# Altium PCB ICAN-7006-IO.PcbDoc
Units mm, origin at the board's own origin, x right, y up, seen from the top; angles counter-clockwise.
Board outline 150 x 80 mm, 2 copper layers (Top Layer, Bottom Layer); 66 components, 116 nets, 497 pads, 0 vias.
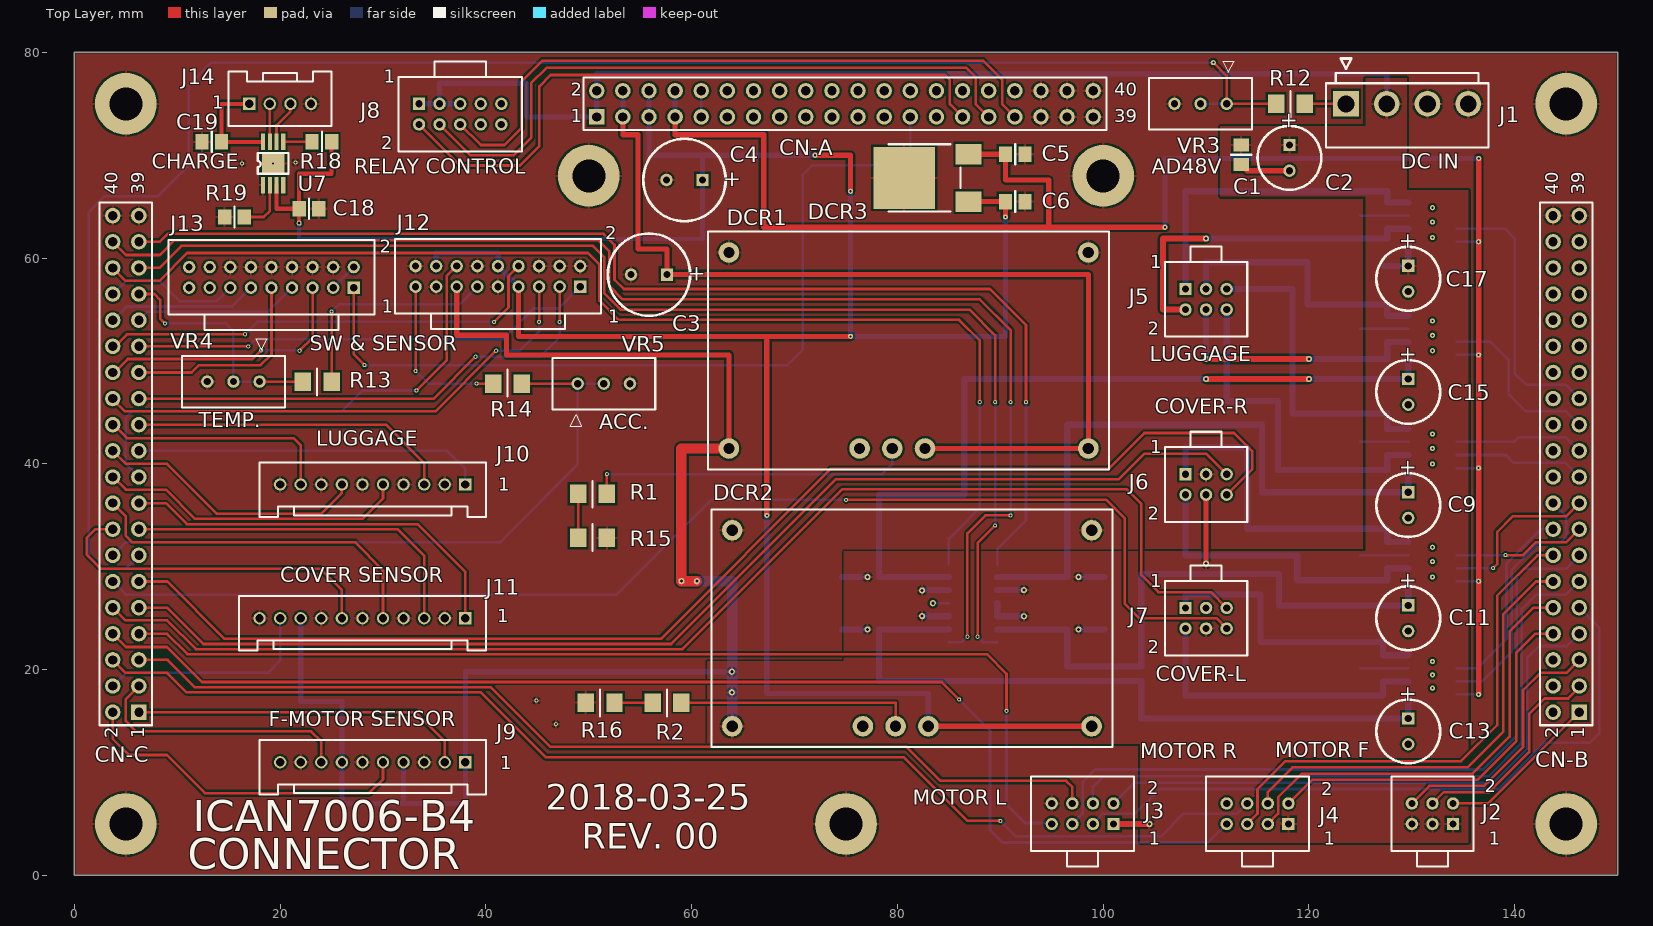
[diagram p0: Top Layer view]
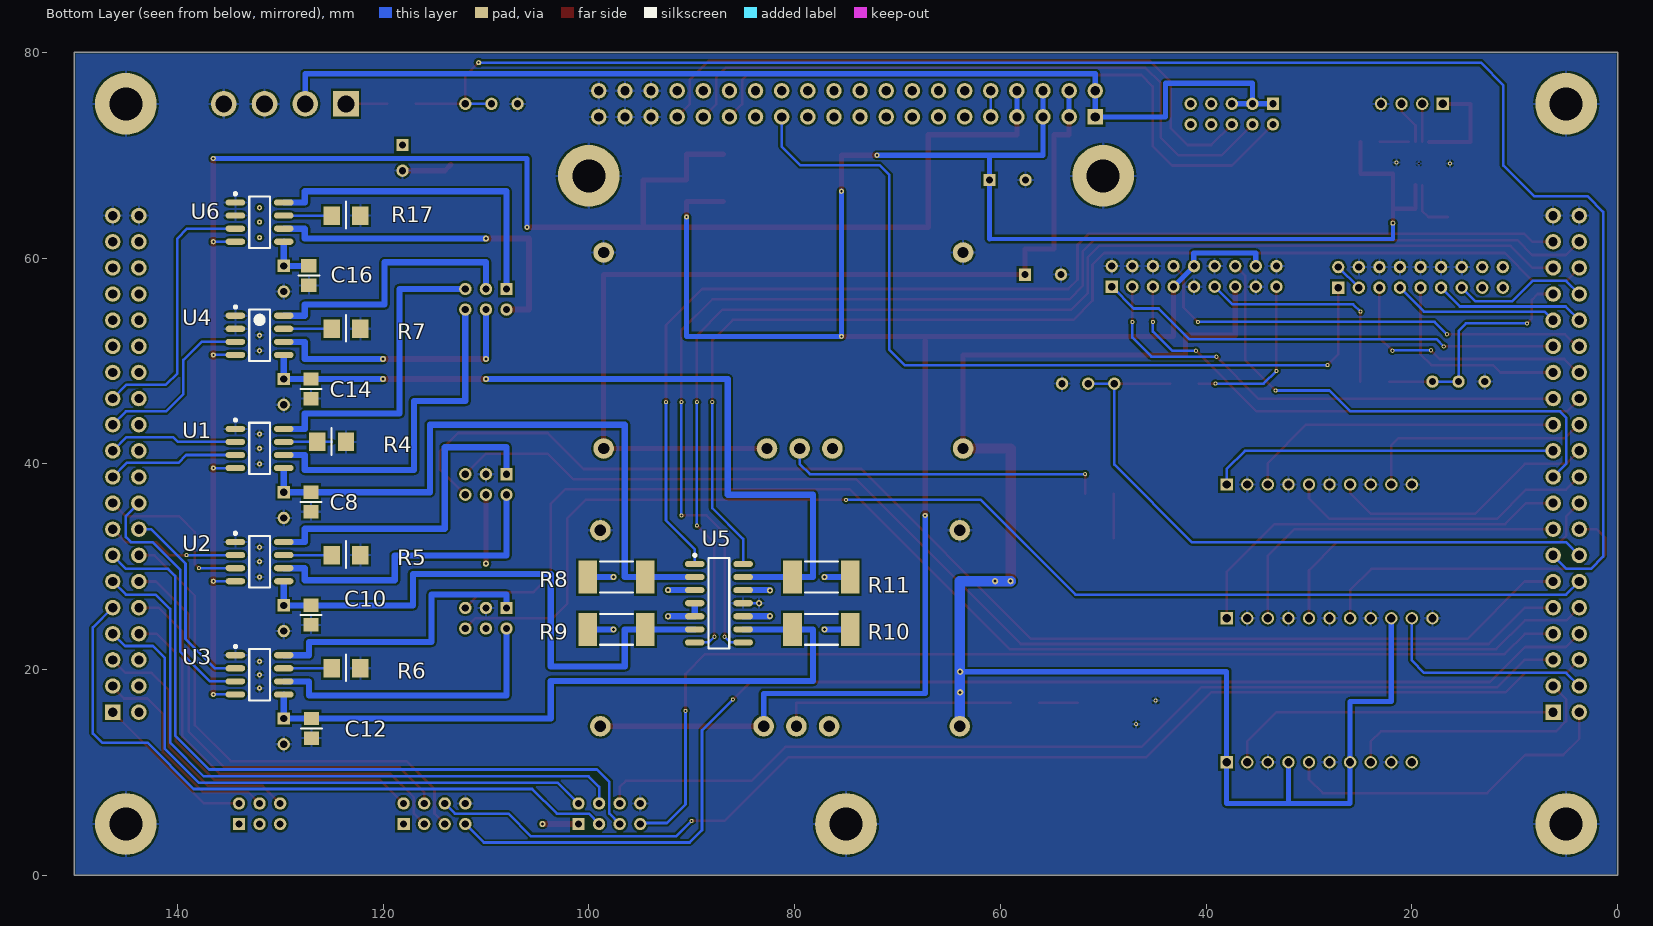
[diagram p1: Bottom Layer view, seen from below]

## Layer stack, top to bottom
Top Layer: signal copper 0.0356
Dielectric: dielectric 0.32, FR-4, Dk 4.8
Bottom Layer: signal copper 0.0356

## Board outline
0,0 0,80 150,80 150,0

## Design rules (kind name [scope] priority, off if disabled: settings)
Clearance [All] p1: gap=0.2
ComponentClearance [All] p1: gap=0.254 collisioncheckmode=3 verticalgap=0.254
HoleSize [All] p1: absolutevalues=TRUE maxlimit=4 minlimit=0.025 maxpercent=80.000 minpercent=20.000
PolygonConnect [All] p1: connectstyle=Relief reliefconductorwidth=0.254 reliefentries=4 polygonreliefangle="90 Angle"
RoutingVias [All] p1: holewidth=0.2 width=0.4 viastyle="Through Hole" minholewidth=0.2 minwidth=0.4 maxholewidth=8 maxwidth=8
SolderMaskExpansion [All] p1: expansion=0.102
TestPointUsage [All] p1: valid=0 allowmultiple=FALSE
Testpoint [All] p1: side=15 testpointundercomponent=TRUE minsize=1.016 maxsize=2.54 preferedsize=1.524 minholesize=0 maxholesize=1.016 preferedholesize=0.813 testpointgrid=0.025 style=1023 order=0123456789
Width [All] p1: maxlimit=2 minlimit=0.254 preferedwidth=0.254
17 further rules are at their usual default settings.

## Components (designator, comment, footprint, x,y, rotation, side; value= is the part's Value field where it differs from the comment)
C1 "100nF" [0805]2012 113.4,70.05 r90 top
C2 "47uF/25V" "CAPA MH5 PITCH2.5MM" 118.1,69.75 r270 top
C3 "330uF/16V" "CAPA WXA PITCH 3.5MM" 55.85,58.4 r180 top
C4 "330uF/16V" "CAPA WXA PITCH 3.5MM" 59.3,67.6 r180 top
C5 "2.2uF" [0805]2012 91.45,70.1 r180 top
C6 "0.33uF" [0805]2012 91.45,65.5 r180 top
C8 "0.1uF" [0805]2012 127,36.3 r270 bottom
C9 "47uF/25V" "CAPA MH5 PITCH2.5MM" 129.65,36 r270 top
C10 "0.1uF" [0805]2012 127,25.3 r270 bottom
C11 "47uF/25V" "CAPA MH5 PITCH2.5MM" 129.65,25 r270 top
C12 "0.1uF" [0805]2012 126.95,14.3 r270 bottom
C13 "47uF/25V" "CAPA MH5 PITCH2.5MM" 129.65,14 r270 top
C14 "0.1uF" [0805]2012 127,47.3 r270 bottom
C15 "47uF/25V" "CAPA MH5 PITCH2.5MM" 129.65,47 r270 top
C16 "0.1uF" [0805]2012 127.2,58.3 r270 bottom
C17 "47uF/25V" "CAPA MH5 PITCH2.5MM" 129.65,58 r270 top
C18 "0.1uF" [0805]2012 22.8,64.8 r180 top
C19 "22uF/10V" [0805]2012 13.35,71.3 r180 top
CN-A "25-0209-220" HDR2X20 50.77,73.73 r0 top locked
CN-B "25-0209-220" HDR2X20 146.27,15.87 r90 top locked
CN-C "25-0209-220" HDR2X20 6.27,15.87 r90 top locked
DCR1 "PTN78020W" PTN78020 63.62,60.55 r0 top
DCR2 "PTN78020W" PTN78020 63.94,33.55 r0 top
DCR3 "NJM2845DL1-33" TO-252-3 80.65,67.8 r180 top
J1 "VH" VH-S4 123.6,75 r0 top
J2 "PHSD 6P" "PHSD WV03X2" 132,6 r180 top
J3 "PHSD 8P" "PHSD WV04X2" 98,6 r180 top
J4 "PHSD 8P" "PHSD WV04X2" 115,6 r180 top
J5 "PHSD 6P" "PHSD WV03X2" 110,56 r0 top
J6 "PHSD 6P" "PHSD WV03X2" 110,38 r0 top
J7 "PHSD 6P" "PHSD WV03X2" 110,25 r0 top
J8 "PHSD 10P" "PHSD WV05X2" 37.5,74 r0 top
J9 "HY 10P" HY-10A 29,11 r180 top
J10 "HY 10P" HY-10A 29,38 r180 top
J11 "HY 11P" HY-11A 28,25 r180 top
J12 "PHSD 18P" "PHSD WV09X2" 41.168,58.223 r180 top
J13 "PHSD 18P" "PHSD WV09X2" 19.155,58.127 r180 top
J14 "HY 4P" HY-4A 20,75 r0 top
R1 "720,1/4W" [1206]3216 50.36,37.1 r0 top
R2 "20k,1/4W" [1206]3216 57.6,16.8 r0 top
R4 "0.1/1W" [1206]3216 125,42.135 r0 bottom
R5 "0.1/1W" [1206]3216 123.6,31.135 r0 bottom
R6 "0.1/1W" [1206]3216 123.6,20.135 r0 bottom
R7 "0.22/1W" [1206]3216 123.6,53.135 r0 bottom
R8 "20mOHM,1W" 6332[2512] 97.3,29 r180 bottom
R9 "20mOHM,1W" 6332[2512] 97.3,23.92 r180 bottom
R10 "20mOHM,1W" 6332[2512] 77.4,23.92 r180 bottom
R11 "20mOHM,1W" 6332[2512] 77.4,29 r180 bottom
R12 "15kF,1/4W" [1206]3216 118.2,75 r0 top
R13 "4.7kF,1/4W" [1206]3216 23.6,48 r0 top
R14 "4.7kF,1/4W" [1206]3216 42.1,47.8 r180 top
R15 "12,1/4W" [1206]3216 50.36,32.8 r180 top
R16 "1k,1/4W" [1206]3216 51.1,16.8 r0 top
R17 "0.22/1W" [1206]3216 123.6,64.135 r0 bottom
R18 "100k,1/8W" [0805]2012 24.05,71.3 r180 top
R19 "50k,1/8W" [0805]2012 15.55,64 r0 top
U1 "DRV8870DDA" D008_L 132,41.5 r180 bottom
U2 "DRV8870DDA" D008_L 132,30.5 r180 bottom
U3 "DRV8870DDA" D008_L 132,19.5 r180 bottom
U4 "DRV8870DDA" D008_L 132,52.5 r180 bottom
U5 "MAX4378TASD+" SOIC150-14_L 87.35,26.46 r180 bottom
U6 "DRV8870DDA" D008_L 132,63.5 r180 bottom
U7 "TPS2511DGN" "DGN 8P" 19.325,69.2 r90 top
VR3 "1K" VR 109.46,75 r270 top
VR4 "10K" VR 15.46,48 r270 top
VR5 "10K" VR 51.46,47.8 r90 top

## Footprints (in the part's own frame and the unit in brackets; to place one, negate y for a bottom-side part, rotate by r counter-clockwise, add the part's x,y. Pads: shape width x height; smd on the part's side, far side on the other; paste and mask are expansions set on the pad)
6332[2512] [mm] "Chip Resistor; Body 6.3 x 3.2 mm (LxW typ)"
  rect 1.8x3.2 smd: 1(-2.8,0) 2(2.8,0)
  silkscreen extent -1.6,-1.5 1.6,1.5
[0805]2012 [mm] "SMD 2.0x1.25"
  rect 1.3x1.5 smd: 1(-0.95,0) 2(0.95,0)
  silkscreen extent 0,-1 0,1
[1206]3216 [mm] "SMD 3.2x1.6"
  rect 1.6x1.8 smd: 1(-1.4,0) 2(1.4,0)
  silkscreen extent 0,-1.35 0,1.25
"CAPA MH5 PITCH2.5MM" [mm] "Capacitor, Electrolytic, Radial; Body 6.3 mm (Dia.xH typ); Pin Spacing 2.5 mm (typ)"
  rect 1.2x1.2 hole 0.7: 1(-1.25,0)
  round 1.2 hole 0.7: 2(1.25,0)
  silkscreen extent -3.1,-3.1 3.1,3.1
"CAPA WXA PITCH 3.5MM" [mm] "Capacitor, Electrolytic, Radial; Body 8 mm (Dia); Pin Spacing 3.5 mm (typ)"
  rect 1.2x1.2 hole 0.7: 1(-1.75,0)
  round 1.2 hole 0.7: 2(1.75,0)
  silkscreen extent -4,-4 4,4
D008_L [mm] "SOIC, 8-Leads, Body 4.9x3.9mm, Pitch 1.27mm, IPC High Density"
  oval 1.9x0.6 smd: 1(-2.35,1.905) 2(-2.35,0.635) 3(-2.35,-0.635) 4(-2.35,-1.905) 5(2.35,-1.905) 6(2.35,-0.635) 7(2.35,0.635) 8(2.35,1.905)
  silkscreen extent -2.48,-2.5 1,2.88, body extent -1.95,-2.45 1.95,2.45, height 1.75
"DGN 8P" [mm] "PowerPAD PLASTIC SMALL OUTLINE Pitch 0.65mm 3x4.9mm"
  round 0.2 hole 0.2: 0(0,0)
  rect 1.6x0.4 smd mask+0.07: 1(-2.1,0.975) 2(-2.1,0.325) 3(-2.1,-0.325) 4(-2.1,-0.975) 5(2.1,-0.975) 6(2.1,-0.325) 7(2.1,0.325) 8(2.1,0.975)
  rect 1.9x2.2 smd mask+0.07: 9(0,0)
  silkscreen extent -1,-1.5 1,1.5
HDR2X20 [mm] "Connector; Header; 20x2 Position"
  rect 1.5x1.5 hole 0.9: 1(0,0)
  round 1.5 hole 0.9: 2(0,2.54) 3(2.54,0) 4(2.54,2.54) 5(5.08,0) 6(5.08,2.54) 7(7.62,0) 8(7.62,2.54) 9(10.16,0) 10(10.16,2.54) 11(12.7,0) 12(12.7,2.54) 13(15.24,0) 14(15.24,2.54) 15(17.78,0) 16(17.78,2.54) 17(20.32,0) 18(20.32,2.54) 19(22.86,0) 20(22.86,2.54) 21(25.4,0) 22(25.4,2.54) 23(27.94,0) 24(27.94,2.54) 25(30.48,0) 26(30.48,2.54) 27(33.02,0) 28(33.02,2.54) 29(35.56,0) 30(35.56,2.54) 31(38.1,0) 32(38.1,2.54) 33(40.64,0) 34(40.64,2.54) 35(43.18,0) 36(43.18,2.54) 37(45.72,0) 38(45.72,2.54) 39(48.26,0) 40(48.26,2.54)
  silkscreen extent -1.27,-1.27 49.53,3.81
HY-4A [mm] "YOLINK PHB CONNECTOR A2006-xxA 2.00mm"
  rect 1.2x1.2 hole 0.8: 1(-3,0)
  round 1.2 hole 0.8: 2(-1,0) 3(1,0) 4(3,0)
  silkscreen extent -5,-2.15 5,3.15
HY-10A [mm] "YOLINK PHB CONNECTOR A2006-xxA 2.00mm"
  rect 1.2x1.2 hole 0.8: 1(-9,0)
  round 1.2 hole 0.8: 2(-7,0) 3(-5,0) 4(-3,0) 5(-1,0) 6(1,0) 7(3,0) 8(5,0) 9(7,0) 10(9,0)
  silkscreen extent -11,-2.15 11,3.15
HY-11A [mm] "YOLINK PHB CONNECTOR A2006-xxA 2.00mm"
  rect 1.2x1.2 hole 0.8: 1(-10,0)
  round 1.2 hole 0.8: 2(-8,0) 3(-6,0) 4(-4,0) 5(-2,0) 6(0,0) 7(2,0) 8(4,0) 9(6,0) 10(8,0) 11(10,0)
  silkscreen extent -12,-2.15 12,3.15
"PHSD WV03X2" [mm] "YOLINK PHSD CONNECTOR A2006-WVxxX2 2.00mm"
  rect 1.2x1.2 hole 0.7: 1(-2,1)
  round 1.2 hole 0.7: 2(-2,-1) 3(0,1) 4(0,-1) 5(2,1) 6(2,-1)
  silkscreen extent -4,-3.62 4,5.13
"PHSD WV04X2" [mm] "YOLINK PHSD CONNECTOR A2006-WVxxX2 2.00mm"
  rect 1.2x1.2 hole 0.7: 1(-3,1)
  round 1.2 hole 0.7: 2(-3,-1) 3(-1,1) 4(-1,-1) 5(1,1) 6(1,-1) 7(3,1) 8(3,-1)
  silkscreen extent -5,-3.62 5,5.13
"PHSD WV05X2" [mm] "YOLINK PHSD CONNECTOR A2006-WVxxX2 2.00mm"
  rect 1.2x1.2 hole 0.7: 1(-4,1)
  round 1.2 hole 0.7: 2(-4,-1) 3(-2,1) 4(-2,-1) 5(0,1) 6(0,-1) 7(2,1) 8(2,-1) 9(4,1) 10(4,-1)
  silkscreen extent -6,-3.62 6,5.13
"PHSD WV09X2" [mm] "YOLINK PHSD CONNECTOR A2006-WVxxX2 2.00mm"
  rect 1.2x1.2 hole 0.7: 1(-8,1)
  round 1.2 hole 0.7: 2(-8,-1) 3(-6,1) 4(-6,-1) 5(-4,1) 6(-4,-1) 7(-2,1) 8(-2,-1) 9(0,1) 10(0,-1) 11(2,1) 12(2,-1) 13(4,1) 14(4,-1) 15(6,1) 16(6,-1) 17(8,1) 18(8,-1)
  silkscreen extent -10,-3.62 10,5.13
PTN78020 [mm] "REGURATOR Ti PTN78020W"
  round 2 hole 1.1: 1(0,0) 2(0,-19.05) 3(12.7,-19.05) 4(15.88,-19.05) 5(19.06,-19.05) 6(34.94,-19.05) 7(34.94,0)
  silkscreen extent -2.03,-21.08 36.96,2.03
SOIC150-14_L [mm] "14-Pin Plastic Narrow Body Small Outline Integrated Circuit 1.27 mm Pitch, IPC High Density"
  oval 1.9x0.6 smd: 1(-2.35,3.81) 2(-2.35,2.54) 3(-2.35,1.27) 4(-2.35,0) 5(-2.35,-1.27) 6(-2.35,-2.54) 7(-2.35,-3.81) 8(2.35,-3.81) 9(2.35,-2.54) 10(2.35,-1.27) 11(2.35,0) 12(2.35,1.27) 13(2.35,2.54) 14(2.35,3.81)
  silkscreen extent -2.48,-4.4 1,4.78, body extent -1.95,-4.33 1.95,4.33, height 1.76
TO-252-3 [mm] "NJM2845"
  rect 2.5x2 smd: 1(-6.25,2.3) 3(-6.25,-2.3)
  rect 6x6 smd: 2(0,0)
  silkscreen extent -5.5,-3.27 1.5,3.27
VH-S4 [mm] "3.96"
  rect 2.5x2.5 hole 1.65: 1(0,0)
  round 2.5 hole 1.65: 2(3.96,0) 3(7.92,0) 4(11.88,0)
  silkscreen extent -1.95,-4.25 13.83,4.4
VR [mm] "VR Trim"
  round 1.2 hole 0.7: 1(0,2.54) 2(0,0) 3(0,-2.54)
  silkscreen extent -4.15,-5 2.5,5

## Part data
C1 C8 C9 C10 C11 C12 C13 C14 C15 C16 C18: library part Cap, "Capacitor"
C2 C3 C4 C17: library part "Cap Pol2", "Polarized Capacitor (Axial)"
C5 C6: library part "Cap Semi", "Capacitor (Semiconductor SIM Model)"
C19: library part "Cap Pol3", "Polarized Capacitor (Surface Mount)"
CN-A CN-B: library part "Header 25X2", "Header, 25-Pin, Dual row"
CN-C: library part "Header 20X2", "Header, 20-Pin, Dual row"
DCR1 DCR2: library part PTN78020
DCR3: library part IC10
J1 J14: library part "Header 4", "Header, 4-Pin"
J2 J6 J7: library part "Header 6", "Header, 6-Pin"
J3 J4 J5: library part "Header 8", "Header, 8-Pin"
J8: library part "Header 20", "Header, 20-Pin"
J9: library part "Header 10", "Header, 10-Pin"
J10: library part "Header 5X2", "Header, 5-Pin, Dual row"
J11: library part "Header 12", "Header, 12-Pin"
J12 J13: library part "Header 18", "Header, 18-Pin"
R1 R2 R4 R5 R6 R7 R8 R9 R10 R11 R12 R13 R14 R15 R16 R17 R18 R19: library part Res1, "Resistor"
U1 U2 U3 U6: library part IC8-WIDE
U4 U5: library part IC14
U7: library part IC8-WIDE, "Power Switch"
VR3 VR4 VR5: library part "RPot SM", "Square Trimming Potentiometer"

## Free pads (board coordinates)
  round 6 hole 3.2: 0(5,5) 0(5,75) 0(50,68) 0(75,5) 0(100,68) 0(145,5) 0(145,75)
  round 0.4 hole 0.2: 0(8.8,53.657) 0(16.3,69.2) 0(16.6,52.601) 0(16.9,51.43) 0(18.148,51.045) 0(21.5,69.3) 0(21.901,51.001) 0(25,54.8) 0(28.2,49.6) 0(33.168,49.032) 0(33.24,47.14) 0(39,50.417) 0(39.1,47.8) 0(40.8,53.8) 0(41,51) 0(44.9,17) 0(45.168,53.8) 0(46.8,14.7) 0(47.168,53.8) 0(51.76,39) 0(75,36.5) 0(86,17.1) 0(86.8,23.2) 0(87.8,23.2) 0(88,46) 0(89.5,34) 0(89.5,46) 0(90,5.3) 0(90.6,16) 0(91,35) 0(91,46) 0(92.5,46) 0(137.9,29.865) 0(139.1,31.135)
  round 0.5 hole 0.3: 0(21.85,63.4)
  round 0.6 hole 0.3: 0(59,28.6) 0(60.5,28.6) 0(63.9,17.8) 0(63.9,19.8) 0(77.1,23.92) 0(77.1,29) 0(82.4,25.2) 0(82.4,27.7) 0(83.44,26.46) 0(92.29,25.19) 0(92.29,27.73) 0(97.6,23.92) 0(97.6,29) 0(104.5,5) 0(110,30.3) 0(110,48.25) 0(110,50.2) 0(110,61.9) 0(120,48.25) 0(120,50.2)
  round 0.5 hole 0.2: 0(67.3,35) 0(72,70) 0(75.45,52.4) 0(75.45,66.5) 0(90.5,64) 0(106,63) 0(110.7,79) 0(132,18.2) 0(132,19.5) 0(132,20.8) 0(132,29) 0(132,30.5) 0(132,31.9) 0(132,40) 0(132,41.5) 0(132,42.9) 0(132,51) 0(132,52.5) 0(132,53.9) 0(132,62) 0(132,63.5) 0(132,64.9) 0(136.495,17.595) 0(136.495,39.595) 0(136.495,50.595) 0(136.495,61.595) 0(136.495,28.595) 0(136.5,69.7)

## Nets (pads, with @x,y where several pads share a name; then routed paths per layer and width w, separated by ;. In a path a pad name is that pad's centre, name@x,y a point inside that pad or via, vN(x,y) a via of type N, cw(c..) or ccw(c..) an arc to the next point about the centre after c; other vN are vias at no path point)
*LIGHT_ON: CN-A.33 J8.6 | length 64.4
  Top Layer w0.254: J8.6 39.5,71 41.8,71 43.45,72.65 43.45,77.15 45.5,79.2 88.3,79.2 90.2,77.3 90.2,74.94 CN-A.33
*MF-DIR: CN-B.3 J2.4 | length 21.7
  Top Layer w0.254: J2.4@132,6.5 J2.4 133.1,8.1 137.5,8.1 141.4,12 141.4,15.7 142.9,17.2 145.2,17.2 146.27,18.27 CN-B.3
*MF-ENB: CN-B.5 J2.6 | length 25.3
  Top Layer w0.254: J2.6 131.7,8.7 137,8.7 140.8,12.5 140.8,18 142.5,19.7 145.02,19.7 CN-B.5
*ML-ALM: CN-C.8 J4.7 pad.0@86,17.1 | length 123.1
  Top Layer w0.254: CN-C.8 5.02,22.2 9,22.2 12.4,18.8 84.3,18.8 pad.0@86,17.1
  Bottom Layer w0.254: pad.0@86,17.1 89,14.1 89,4.4 90.2,3.2 110.2,3.2 J4.7
*ML-BRAKE: CN-B.10 J4.3 | length 43.4
  Top Layer w0.254: J4.3 117,6 117,7.6 119.3,9.9 135.9,9.9 139.5,13.5 139.5,23.7 141.83,26.03 CN-B.10
*ML-ENB: CN-B.12 J4.4 | length 44
  Top Layer w0.254: J4.4 116,8.1 118.4,10.5 135.4,10.5 138.9,14 138.9,25.4 142.07,28.57 CN-B.12
*ML-F/*R: CN-B.8 J4.2 | length 37.6
  Top Layer w0.254: J4.2 120.3,9.3 136.4,9.3 140.163,13.063 140.163,21.663 141.99,23.49 CN-B.8
*ML-PG: CN-C.6 J4.6 pad.0@90,5.3 | length 118.7
  Top Layer w0.254: CN-C.6 4.98,19.7 9,19.7 10.899,17.801 39.499,17.801 45.8,11.5 80.6,11.5 86.8,5.3 pad.0@90,5.3
  Bottom Layer w0.254: pad.0@90,5.3 91.5,3.8 105.6,3.8 107.8,6 113,6 J4.6
*MLL-PG_B: CN-C.12 J7.6 pad.0@75,36.5 | length 122.6
  Top Layer w0.254: pad.0@75,36.5 100.3,36.5 102.1,34.7 102.1,26.4 103.5,25 111,25 J7.6
  Bottom Layer w0.254: CN-C.12 5,27.3 52.7,27.3 61.9,36.5 pad.0@75,36.5
*MLL-PG_F: CN-C.10 J7.5 | length 125.2
  Top Layer w0.254: CN-C.10 4.96,24.8 9,24.8 11.799,22.001 59.101,22.001 74.64,37.54 102.26,37.54 103.7,36.1 103.7,29.2 105.36,27.54 110.46,27.54 J7.5
*MLR-PG_B: CN-C.11 J6.6 | length 124.8
  Top Layer w0.254: CN-C.11 9.03,28.57 14.599,23.001 57.001,23.001 73.5,39.5 100.5,39.5 104,43 112.7,43 114.5,41.2 114.5,39.5 J6.6
*MLR-PG_F: CN-C.9 J6.5 | length 115.7
  Top Layer w0.254: CN-C.9 9,26.03 12.53,22.5 58,22.5 74,38.5 101.5,38.5 104,41 110,41 J6.5
*MOTOR_ON1: CN-A.29 J8.2 | length 64.6
  Top Layer w0.254: J8.2 37.5,69 43.3,69 45.2,70.9 45.2,76.7 46.3,77.8 84.6,77.8 85.1,77.3 85.1,74.96 CN-A.29
*MOTOR_ON2: CN-A.31 J8.4 | length 64.7
  Top Layer w0.254: J8.4 38.5,70 42.7,70 44.4,71.7 44.4,77 45.9,78.5 86.7,78.5 87.6,77.6 87.6,75 CN-A.31
*MR-ALM: CN-C.7 J3.7 pad.0@90.6,16 | length 103.7
  Top Layer w0.254: CN-C.7 9.01,23.49 11,21.5 88.7,21.5 90.6,19.6 pad.0@90.6,16
  Bottom Layer w0.254: pad.0@90.6,16 90.6,6.9 92.4,5.1 J3.7@94.9,5.1
*MR-BRAKE: CN-B.9 J3.3 | length 65.9
  Bottom Layer w0.254: J3.3 100,6 103.1,6 105.5,8.4 138.4,8.4 142.9,12.9 147.3,12.9 148.2,13.8 148.2,24.1 CN-B.9
*MR-ENB: CN-B.11 J3.4 | length 64.8
  Bottom Layer w0.254: J3.4 99,8.6 100.025,9.625 137.425,9.625 140.7,12.9 140.7,25.9 142.1,27.3 145,27.3 CN-B.11
*MR-F/*R: CN-B.7 J3.2 | length 57.3
  Bottom Layer w0.254: J3.2 103,9 137.9,9 141.2,12.3 141.2,21.14 142.36,22.3 145.08,22.3 CN-B.7
*MR-PG: CN-C.5 J3.6 | length 97.4
  Top Layer w0.254: CN-C.5 9.05,20.95 11.699,18.301 40.47,18.301 46.271,12.5 80.9,12.5 84.2,9.2 96.4,9.2 97,8.6 J3.6
*SNS-COVER: CN-C.19 J12.14 pad.0@33.24,47.14 | length 49.4
  Top Layer w0.254: pad.0@33.24,47.14 36.2,50.1 36.2,58.298 37.125,59.223 J12.14
  Bottom Layer w0.254: CN-C.19 5,40 5,44.5 5.6,45.1 25.96,45.1 28,47.14 pad.0@33.24,47.14
*SNS-HOME_C: CN-C.3 J9.8 | length 25.8
  Top Layer w0.254: CN-C.3 5,17.14 5,15 6,14 23,14 24,13 J9.8
*SNS-HOME_L: CN-C.2 J9.5 | length 33.3
  Top Layer w0.254: CN-C.2 3.73,13.27 5.298,11.702 8.998,11.702 12.7,8 28.66,8 30,9.34 J9.5
*SNS-HOME_R: CN-C.1 J9.2 | length 32.9
  Top Layer w0.254: CN-C.1 33.17,15.87 36,13.04 J9.2
*SNS-MIC_CLOSE: CN-C.4 J11.10 | length 21.4
  Bottom Layer w0.254: CN-C.4 5.02,19.7 18.8,19.7 20,20.9 J11.10
*SNS-RAIN: CN-C.30 J12.8 pad.0@16.6,52.601 pad.0@40.8,53.8 | length 44.5
  Top Layer w0.254: CN-C.30 3.93,51.43 5.101,52.601 pad.0@16.6,52.601 ; pad.0@40.8,53.8 42.2,55.2 42.2,58.255 J12.8
  Bottom Layer w0.254: pad.0@16.6,52.601 17.799,53.8 pad.0@40.8,53.8
*SW-A/*M: CN-C.28 J13.5 pad.0@18.148,51.045 pad.0@21.901,51.001 | length 25.7
  Top Layer w0.254: CN-C.28 3.89,48.89 5.2,50.2 17.303,50.2 pad.0@18.148,51.045 ; pad.0@21.901,51.001 23.155,52.255 J13.5
  Bottom Layer w0.254: pad.0@18.148,51.045 pad.0@21.857,51.045
*SW-BRAKE: CN-C.27 J13.9 | length 20.1
  Top Layer w0.254: CN-C.27 11.39,48.89 12.1,49.6 18.1,49.6 19.155,50.655 J13.9
*SW-EMERGENCY: CN-A.25 J13.1 pad.0@28.2,49.6 | length 82.7
  Top Layer w0.254: J13.1 27.155,50.645 pad.0@28.2,49.6
  Bottom Layer w0.254: pad.0@28.2,49.6 69.3,49.6 70.786,51.086 70.786,68.086 71.747,69.047 79.447,69.047 81.25,70.85 CN-A.25
*SW-LUG-B_OR: CN-C.24 J10.9 | length 22.9
  Top Layer w0.254: CN-C.24 3.81,43.81 5.12,42.5 21.32,42.5 22,41.82 J10.9
*SW-LUG-B_POS: CN-C.22 J10.7 | length 26.5
  Top Layer w0.254: CN-C.22 5,40 9,40 13.849,35.151 23.991,35.151 26,37.16 J10.7
*SW-LUG-CENTER: CN-C.20 J10.5 | length 30.1
  Top Layer w0.254: CN-C.20 3.77,38.73 5,37.5 8.9,37.5 11.745,34.655 28.015,34.655 30,36.64 J10.5
*SW-LUG-F_OR: CN-C.23 J10.3 | length 31.4
  Top Layer w0.254: CN-C.23 30.27,43.81 34,40.08 J10.3
*SW-LUG-F_POS: CN-C.21 J10.1 | length 34
  Bottom Layer w0.254: CN-C.21 36.23,41.27 38,39.5 J10.1
*SW-LUG_DN: CN-C.34 J13.13 | length 13.3
  Bottom Layer w0.254: CN-C.34 5.02,57.8 8.255,57.8 10.255,55.8 13.828,55.8 J13.13
*SW-LUG_UP: CN-C.32 J13.11 | length 14.7
  Bottom Layer w0.254: CN-C.32 5.06,55.3 15.328,55.3 J13.11
*SW-MLL_CLOSE: CN-C.16 J11.7 | length 33.5
  Top Layer w0.254: CN-C.16 2.05,33.65 1.2,32.8 1.2,31.2 2.6,29.8 23.94,29.8 26,27.74 J11.7
*SW-MLL_OPEN: CN-C.18 J11.5 | length 34.2
  Top Layer w0.254: CN-C.18@4.101,35.801 5,34.902 5,33 5.6,32.4 27.26,32.4 30,29.66 J11.5
*SW-MLR_CLOSE: CN-C.15 J11.3 | length 34.9
  Top Layer w0.254: CN-C.15 31.43,33.65 34,31.08 J11.3
*SW-MLR_OPEN: CN-C.17 J11.1 | length 39
  Top Layer w0.254: CN-C.17 8.91,36.19 10.947,34.153 33.347,34.153 38,29.5 J11.1
*SW-SEAT: CN-C.29 J12.1 pad.0@16.9,51.43 | length 45.3
  Top Layer w0.254: CN-C.29 pad.0@16.9,51.43
  Bottom Layer w0.254: pad.0@16.9,51.43 17.57,52.1 41.602,52.1 44.602,55.1 47.045,55.1 J12.1
*SW_CLOSE: CN-C.26 J12.5 pad.0@41,51 pad.0@45.168,53.8 | length 49.6
  Top Layer w0.254: CN-C.26 3.73,46.27 4.9,45.1 35.1,45.1 pad.0@41,51 ; pad.0@45.168,53.8 J12.5
  Bottom Layer w0.254: pad.0@41,51 43.302,51 45.168,52.866 pad.0@45.168,53.8
*SW_FORWORD: CN-C.31 J13.7 | length 16.2
  Bottom Layer w0.254: CN-C.31 7.101,54.801 18.829,54.801 J13.7
*SW_OPEN: CN-C.25 J12.3 pad.0@39,50.417 pad.0@47.168,53.8 | length 48.3
  Top Layer w0.254: CN-C.25 34.933,46.35 pad.0@39,50.417 ; pad.0@47.168,53.8 J12.3
  Bottom Layer w0.254: pad.0@39,50.417 45.317,50.417 47.168,52.268 pad.0@47.168,53.8
AD-48V: CN-C.13 pad.0@110.7,79 R12.1 VR3.1 VR3.2 | length 171.2
  Top Layer w0.254: pad.0@110.7,79 112,77.7 VR3.1 R12.1
  Bottom Layer w0.254: CN-C.13 4.96,29.8 2.6,29.8 1.4,31 1.4,64.5 2.9,66 8.1,66 11.1,69 11.1,76.8 13.3,79 pad.0@110.7,79 ; VR3.2 VR3.1
AD-ACC: CN-C.14 R14.1 VR5.1 VR5.2 | length 64.7
  Top Layer w0.254: R14.1 VR5.1
  Bottom Layer w0.254: CN-C.14 5.02,32.4 41.4,32.4 48.92,39.92 VR5.1 VR5.2
AD-TEMP: CN-C.33 pad.0@8.8,53.657 R13.1 VR4.1 VR4.2 | length 23.4
  Top Layer w0.254: CN-C.33 7.79,56.51 8.345,55.955 8.345,54.112 pad.0@8.8,53.657 ; VR4.1 R13.1
  Bottom Layer w0.254: pad.0@8.8,53.657 14.743,53.657 15.46,52.94 VR4.2 VR4.1
DC3.3V: C5.2 CN-A.7 CN-A.8 DCR3.3 pad.0@106,63 pad.0@136.5,69.7 pad.0@136.495,17.595 pad.0@136.495,28.595 pad.0@136.495,39.595 pad.0@136.495,50.595 pad.0@136.495,61.595 U1.4 U2.4 U3.4 U4.4 U6.4 | length 175.8
  Top Layer w0.5: CN-A.7 58.39,72 67,72 67,63 pad.0@106,63 ; DCR3.3 C5.2 90.5,67.6 94.7,67.6 94.7,63 ; pad.0@136.495,17.595 pad.0@136.495,69.7
  Bottom Layer w0.254: U3.4 pad.0@136.495,17.595 ; U2.4 pad.0@136.495,28.595 ; U1.4 pad.0@136.495,39.595 ; U4.4 pad.0@136.495,50.595 ; U6.4 pad.0@136.495,61.595
  Bottom Layer w0.5: CN-A.7 CN-A.8 ; pad.0@106,63 106,69.7 pad.0@136.5,69.7
DC5V: C4.1 C6.2 C18.2 CN-A.5 CN-A.6 DCR2.5 DCR2.6 DCR3.1 J12.7 J12.10 J12.16 pad.0@21.85,63.4 pad.0@67.3,35 pad.0@72,70 pad.0@75.45,52.4 pad.0@75.45,66.5 pad.0@90.5,64 R18.1 U7.3 | length 257.3
  Top Layer w0.4: U7.3 19.65,64.8 C18.2 ; pad.0@21.85,63.4 21.85,68.2 25,68.2 R18.1
  Top Layer w0.5: J12.7 43.168,52.4 pad.0@75.45,52.4 ; pad.0@67.3,35 67.3,52 ; pad.0@71.95,70 75.45,70 pad.0@75.45,66.5 ; DCR2.5 DCR2.6 ; DCR3.1 C6.2 pad.0@90.5,64
  Bottom Layer w0.4: pad.0@21.85,63.4 21.85,61.848 61.05,61.848
  Bottom Layer w0.5: J12.16 35.168,60.5 41.2,60.5 41.2,59.191 J12.7 ; CN-A.6 55.85,70 pad.0@72,70 ; 61.05,61.848 61.05,70 ; pad.0@67.3,35 67.3,17.7 83,17.7 DCR2.5 ; pad.0@75.45,66.5 75.45,52.4 90.5,52.4 pad.0@90.5,64
DC12V: C3.1 CN-A.3 CN-A.4 DCR1.5 DCR1.6 | length 95.9
  Top Layer w0.5: CN-A.3 53.31,72 54.8,72 54.8,60.9 57.6,60.9 C3.1 98.56,58.4 DCR1.6 DCR1.5
  Bottom Layer w0.5: CN-A.3 CN-A.4
DC24V: C1.2 C2.1 C16.1 C17.1 CN-A.1 CN-A.2 DCR1.2 DCR2.2 J1.2 J2.1 J2.3 J2.5 J3.1 J4.1 J6.4 J7.4 J8.1 J8.3 J8.5 J9.1 J9.4 J9.7 J11.9 J12.13 pad.0@59,28.6 pad.0@60.5,28.6 pad.0@63.9,17.8 pad.0@63.9,19.8 pad.0@77.1,23.92 pad.0@77.1,29 pad.0@82.4,25.2 pad.0@82.4,27.7 pad.0@92.29,25.19 pad.0@92.29,27.73 pad.0@97.6,23.92 pad.0@97.6,29 pad.0@104.5,5 pad.0@110,30.3 R8.1 R9.1 R10.2 R11.2 U5.3 U5.4 U5.5 U5.10 U5.12 U6.5 | length 303
  Top Layer w0.254: J1.2@127,75 J1.2 J1.2@127.56,74.64
  Top Layer w0.5: J12.13 37.168,52.5 42.002,52.5 42,52.498 42,50.6 63.62,50.6 DCR1.2 ; pad.0@110,30.3 J6.4
  Top Layer w0.6: J3.1 pad.0@104.5,5
  Top Layer w1: pad.0@60.5,28.6 59,28.6 59,41.5 DCR1.2
  Bottom Layer w0.254: pad.0@82.41,27.71 pad.0@82.43,27.73
  Bottom Layer w0.5: J11.9 22,16.9 26,16.9 26,7 38,7 38,19.8 pad.0@63.94,19.8 ; 32,7.02 J9.4 ; J8.1 J8.5 ; J8.3 35.5,77 43.94,77 43.94,73.73 CN-A.1 50.77,77.92 127.56,77.92 J1.2
  Bottom Layer w0.6: R10.2 pad.0@77.1,23.92 ; R11.2 pad.0@77.1,29 ; pad.0@82.41,25.19 U5.10 ; pad.0@82.41,27.73 U5.12 ; U5.4 U5.5 pad.0@92.29,25.19 ; U5.3 pad.0@92.29,27.73 ; pad.0@97.6,23.92 R9.1 ; pad.0@97.6,29 R8.1 ; C16.1 C17.1 U6.5
  Bottom Layer w1: pad.0@59,28.6 63.94,28.6 DCR2.2
DC48V: J1.1 R12.2 | length 4
  Top Layer w0.254: R12.2 J1.1
GND: C1.1 C2.2 C3.2 C4.2 C5.1 C6.1 C8.2 C9.2 C10.2 C11.2 C12.2 C13.2 C14.2 C15.2 C16.2 C17.2 C18.1 C19.2 CN-A.35 CN-A.36 CN-A.37 CN-A.38 CN-A.39 CN-A.40 CN-B.39 CN-B.40 CN-C.39 CN-C.40 DCR1.1 DCR1.7 DCR2.1 DCR2.7 DCR3.2 J1.3 J1.4 J3.8 J4.8 J6.3 J7.3 J9.3 J9.6 J9.9 J10.2 J10.4 J10.6 J10.8 J10.10 J11.2 J11.4 J11.6 J11.8 J11.11 J12.2 J12.4 J12.6 J12.9 J12.12 J12.15 J12.18 J13.4 J13.6 J13.8 J13.10 J13.12 J13.14 J14.4 pad.0@5,5 pad.0@5,75 pad.0@16.3,69.2 pad.0@21.5,69.3 pad.0@44.9,17 pad.0@46.8,14.7 pad.0@50,68 pad.0@75,5 pad.0@83.44,26.46 pad.0@100,68 pad.0@132,18.2 pad.0@132,19.5 pad.0@132,20.8 pad.0@132,29 pad.0@132,30.5 pad.0@132,31.9 pad.0@132,40 pad.0@132,41.5 pad.0@132,42.9 pad.0@132,51 pad.0@132,52.5 pad.0@132,53.9 pad.0@145,5 pad.0@145,75 R4.1 R5.1 R6.1 R7.1 R15.1 R16.1 R17.1 R19.1 U1.1 U2.1 U3.1 U4.1 U4.2 U5.11 U6.1 U6.2 U7.0 U7.1 U7.9 VR3.3 VR4.3 VR5.3 | length 6.5
  Top Layer w0.5: C1.1 114,68.5 C2.2
  Bottom Layer w0.254: pad.0@83.44,26.46 U5.11
I2C_SCL: CN-A.18
I2C_SCL2: CN-A.20
I2C_SDA: CN-A.17
I2C_SDA2: CN-A.19
LUG-BRAKE: CN-B.23 U4.3 | length 17.2
  Bottom Layer w0.254: U4.3 137.635,51.865 139.4,50.1 139.4,46.8 141.1,45.1 144.98,45.1 CN-B.23
LUG-PWM1: CN-B.19 U1.3 | length 12.8
  Bottom Layer w0.254: U1.3 139.135,40.865 139.9,40.1 144.918,40.1 CN-B.19@146.27,38.748
LUG-PWM2: CN-B.21 U1.2 | length 12.7
  Bottom Layer w0.254: U1.2 139.935,42.135 140.401,42.601 144.939,42.601 CN-B.21
MF-PWM: CN-B.1 J2.2 | length 15.9
  Top Layer w0.254: J2.2 137.4,7 CN-B.1
MIC-MOTOR: CN-B.25 U6.3 | length 26.4
  Bottom Layer w0.254: U6.3 139.035,62.865 140,61.9 140,48.8 141.1,47.7 144.92,47.7 CN-B.25
ML-PWM: CN-B.14 J4.5 | length 49.3
  Top Layer w0.254: J4.5 115,6 115,8.4 116.5,9.9 117.7,11.1 122.2,11.1 134.8,11.1 138.3,14.6 138.3,27.2 142.21,31.11 CN-B.14
MLL-PWM1: CN-B.16 U3.2 | length 19.3
  Bottom Layer w0.254: U3.2 136.335,20.135 139.201,23.001 139.201,30.301 142.55,33.65 CN-B.16
MLL-PWM2: CN-B.18 U3.3 | length 24.9
  Bottom Layer w0.254: U3.3 136.835,18.865 139.701,21.731 139.701,29.701 142.4,32.4 144.5,32.4 145,32.9 145,34.92 CN-B.18
MLR-PWM1: CN-B.15 pad.0@139.1,31.135 U2.2 | length 13
  Top Layer w0.254: pad.0@139.1,31.135 140.8,31.135 142.065,32.4 145.02,32.4 CN-B.15
  Bottom Layer w0.254: U2.2 pad.0@139.1,31.135
MLR-PWM2: CN-B.17 pad.0@137.9,29.865 U2.3 | length 16.4
  Top Layer w0.254: pad.0@137.9,29.865 138.3,30.265 138.3,33.4 139.8,34.9 144.98,34.9 CN-B.17
  Bottom Layer w0.254: U2.3 pad.0@137.9,29.865
MR-PWM: CN-B.13 J3.5 | length 71
  Bottom Layer w0.254: J3.5 98.001,6.001 98.001,9.101 99.2,10.3 136.9,10.3 140.2,13.6 140.2,29.1 140.9,29.8 144.96,29.8 CN-B.13
NetC8_1: C8.1 C9.1 R8.2 U1.5 U5.2 | length 63.6
  Bottom Layer w0.6: U5.2 96.5,29 96.5,43.8 115.45,43.8 115.45,37.25 C9.1 U1.5
NetC10_1: C10.1 C11.1 R9.2 U2.5 U5.6 | length 58
  Bottom Layer w0.6: U5.6 96.5,23.92 96.5,20.3 103.7,20.3 103.7,29.3 117.1,29.3 117.1,26.25 C11.1 U2.5
NetC12_1: C12.1 C13.1 R10.1 U3.5 U5.9 | length 69.3
  Bottom Layer w0.6: U5.9 78.2,23.92 78.2,18.9 103.7,18.9 103.7,15.25 C13.1 U3.5
NetC14_1: C14.1 C15.1 pad.0@110,48.25 pad.0@120,48.25 R11.1 U4.5 U5.13 | length 79.8
  Top Layer w0.6: pad.0@110,48.25 pad.0@120,48.25
  Bottom Layer w0.6: U5.13 78.2,29 78.2,37 86.5,37 86.5,48.25 pad.0@110,48.25 ; pad.0@120,48.25 C15.1 U4.5
NetC19_1: C19.1 J14.1 U7.8 | length 10.4
  Top Layer w0.4: C19.1 U7.8 ; C19.1@14.3,71.4 14.3,75 J14.1
NetDCR1_4: DCR1.4 pad.0@51.76,39 R1.2 | length 31.6
  Top Layer w0.254: R1.2 pad.0@51.76,39
  Bottom Layer w0.254: pad.0@51.76,39 78.5,39 79.5,40 DCR1.4
NetDCR2_4: DCR2.4 R2.2 | length 23.1
  Top Layer w0.254: R2.2 79.82,16.8 DCR2.4
NetJ5_1: J5.1 U6.8 | length 32.2
  Bottom Layer w0.6: J5.1 108,66.5 127.6,66.5 127.6,65.405 U6.8
NetJ5_2: J5.2 pad.0@110,61.9 U6.6 | length 33.9
  Top Layer w0.6: J5.2 105.8,55 105.8,61.9 pad.0@110,61.9
  Bottom Layer w0.6: pad.0@110,61.9 127.6,61.9 127.6,62.865 U6.6
NetJ5_3: J5.3 U4.8 | length 27.4
  Bottom Layer w0.6: J5.3 110,59.6 119.85,59.6 119.85,55.5 127.6,55.5 127.6,54.405 U4.8
NetJ5_4: J5.4 pad.0@110,50.2 pad.0@120,50.2 U4.6 | length 26.1
  Top Layer w0.6: pad.0@110,50.2 pad.0@120,50.2
  Bottom Layer w0.6: pad.0@110,50.2 J5.4 ; pad.0@120,50.2 127.6,50.2 127.6,51.865 U4.6
NetJ5_5: J5.5 U1.8 | length 31.2
  Bottom Layer w0.6: J5.5 118.4,57 118.4,44.9 127.6,44.9 127.6,43.405 U1.8
NetJ5_6: J5.6 U1.6 | length 34.7
  Bottom Layer w0.6: J5.6 112,46.1 117,46.1 117,39.4 127.6,39.4 127.6,40.865 U1.6
NetJ6_1: J6.1 U2.8 | length 33.5
  Bottom Layer w0.6: J6.1 108,41.625 114,41.625 114,33.7 127.6,33.7 127.6,32.405 U2.8
NetJ6_2: J6.2 U2.6 | length 31.1
  Bottom Layer w0.6: J6.2 108,31.1 118.854,31.1 118.854,28.7 127.6,28.7 127.6,29.865 U2.6
NetJ7_1: J7.1 U3.8 | length 28.8
  Bottom Layer w0.6: J7.1 108,27.3 115.3,27.3 115.3,22.7 127.2,22.7 127.2,21.405 U3.8
NetJ7_2: J7.2 U3.6 | length 29.5
  Bottom Layer w0.6: J7.2 108,17.5 127.2,17.5 127.2,18.865 U3.6
NetJ13_2: J13.2 J13.3 | length 2.8
  Bottom Layer w0.254: J13.3 J13.2
NetJ14_2: J14.2 U7.7 | length 3.7
  Top Layer w0.254: U7.7 J14.2
NetJ14_3: J14.3 U7.6 | length 4.3
  Top Layer w0.254: U7.6 19.65,72.9 21,74.25 J14.3
NetR1_1: R1.1 R15.2 | length 4.3
  Top Layer w0.254: R15.2 R1.1
NetR2_1: R2.1 R16.2 | length 3.7
  Top Layer w0.254: R16.2 R2.1
NetR4_2: R4.2 U1.7 | length 4.6
  Bottom Layer w0.254: 125,42.135 U1.7
NetR5_2: R5.2 U2.7 | length 4.6
  Bottom Layer w0.254: R5.2 U2.7
NetR6_2: R6.2 U3.7 | length 4.6
  Bottom Layer w0.254: R6.2 U3.7
NetR7_2: R7.2 U4.7 | length 4.6
  Bottom Layer w0.254: R7.2 U4.7
NetR17_2: R17.2 U6.7 | length 4.6
  Bottom Layer w0.254: R17.2 U6.7
NetR18_2: R18.2 U7.5 | length 2.8
  Top Layer w0.254: U7.5 R18.2
NetR19_2: R19.2 U7.2 | length 5.2
  Top Layer w0.254: R19.2 18.4,64 19,64.6 U7.2
PCM-CK: CN-B.35
PCM-DI: CN-B.34
PCM-DO: CN-B.33
PCM-SYNC: CN-B.36
SNS-ACC: J12.17 pad.0@33.168,49.032 pad.0@39.1,47.8 R14.2 | length 16.2
  Top Layer w0.254: pad.0@33.168,49.032 J12.17 ; pad.0@39.1,47.8 R14.2
  Bottom Layer w0.254: pad.0@33.168,49.032 34.4,47.8 pad.0@39.1,47.8
SNS-BRAKE_CURR: CN-C.36 pad.0@88,46 U5.14 | length 114.4
  Top Layer w0.254: CN-C.36 4.98,57.8 8.255,57.8 10.955,60.5 49.9,60.5 51.039,59.361 51.039,55.861 52.9,54 86,54 88,52 pad.0@88,46
  Bottom Layer w0.254: U5.14 85,32.7 88,35.7 pad.0@88,46
SNS-LUG-CURR: CN-C.37 pad.0@92.5,46 U5.1 | length 116.6
  Top Layer w0.254: CN-C.37 8.292,61.59 9.068,62.366 51.434,62.366 52.5,61.3 52.5,57.9 53.4,57 89,57 92.5,53.5 pad.0@92.5,46
  Bottom Layer w0.254: U5.1 89.7,31.7 92.5,34.5 pad.0@92.5,46
SNS-MLL_CURR: CN-C.38 pad.0@86.8,23.2 pad.0@91,35 pad.0@91,46 U5.8 | length 129
  Top Layer w0.254: CN-C.38 5.02,60.3 8.3,60.3 9.752,61.752 50.916,61.752 52,60.668 52,57.3 53.3,56 88,56 91,53 pad.0@91,46 ; pad.0@86.8,23.2 86.8,33.25 88.55,35 pad.0@91,35
  Bottom Layer w0.254: U5.8 86.25,22.65 pad.0@86.8,23.2 ; pad.0@91,35 pad.0@91,46
SNS-MLR_CURR: CN-C.35 pad.0@87.8,23.2 pad.0@89.5,34 pad.0@89.5,46 U5.7 | length 121.9
  Top Layer w0.254: CN-C.35 8.25,59.05 10.4,61.2 50.402,61.2 51.501,60.101 51.501,56.599 53.1,55 87,55 89.5,52.5 pad.0@89.5,46 ; pad.0@87.8,23.2 87.8,32.3 pad.0@89.5,34
  Bottom Layer w0.254: pad.0@87.8,23.2 88.35,22.65 U5.7 ; pad.0@89.5,34 pad.0@89.5,46
SNS-TEMP: J12.11 pad.0@25,54.8 R13.2 | length 22
  Top Layer w0.254: R13.2 pad.0@25,54.8
  Bottom Layer w0.254: pad.0@25,54.8 25.7,55.5 37.445,55.5 J12.11
UART-CB_RX: CN-A.22
UART-CB_TX: CN-A.21
US_EMG: CN-A.26
US_POWER: CN-A.32
USB_5V: CN-A.9 CN-A.10 | length 2.5
  Bottom Layer w0.254: CN-A.9 CN-A.10
USB_DM1: CN-A.11
USB_DM2: CN-A.12
USB_DP1: CN-A.13
USB_DP2: CN-A.14
USB_POWER: CN-A.30
pads on no net: CN-A.15 CN-A.16 CN-A.23 CN-A.24 CN-A.27 CN-A.28 CN-A.34 CN-B.2 CN-B.4 CN-B.6 CN-B.20 CN-B.22 CN-B.24 CN-B.26 CN-B.27 CN-B.28 CN-B.29 CN-B.30 CN-B.31 CN-B.32 CN-B.37 CN-B.38 DCR1.3 DCR2.3 J8.7 J8.8 J8.9 J8.10 J9.10 J13.15 J13.16 J13.17 J13.18 U7.4

## Polygon pours and split planes (outlines as drawn)
GND on Top Layer "Top Layer-No Net" (solid, pour order 1002): 0.127,0.127 149.873,0.127 149.873,79.873 0.127,79.873
DC24V on Top Layer "Top Layer-No Net 1" (solid, pour order 1001): 135.5,66.6 129.5,66.6 129.5,77.5 125.5,77.5 125.5,72.8 111.4,72.8 111.4,66 125.5,66 125.5,31.5 74.8,31.5 74.8,20.8 61.5,20.8 61.5,12.8 103.6,12.8 103.6,3.2 135.5,3.2
GND on Bottom Layer "Bottom Layer-No Net" (solid, pour order 1000): 0.127,0.127 149.873,0.127 149.873,79.873 0.127,79.873

## Silkscreen, mask and mechanical layers (free items; w line width, h text height)
Top Overlay:
  text "CHARGE" at 7.5,68.2 h2.5
  text "DC IN" at 128.9,68.2 h2.5
  text "RELAY CONTROL" at 27.2,67.7 h2.5
  text "AD48V" at 104.7,67.7 h2.5
  text "SW & SENSOR" at 22.9,50.5 h2.5
  text "LUGGAGE" at 104.5,49.5 h2.5
  text "COVER-R" at 105,44.4 h2.5
  text "TEMP." at 12.1,43.1 h2.5
  text "ACC." at 51,42.9 h2.5
  text "LUGGAGE" at 23.5,41.27 h2.5
  text "COVER SENSOR" at 20,28 h2.5
  text "COVER-L" at 105.1,18.4 h2.5
  text "F-MOTOR SENSOR" at 18.9,14 h2.5
  text "MOTOR F" at 116.7,11 h2.5
  text "MOTOR R" at 103.6,10.9 h2.5
  text "2018-03-25" at 45.8,6.4 h2.5
  text "MOTOR L" at 81.5,6.4 h2.5
  text "ICAN7006-B4" at 11.5,4.3 h3
  text "REV. 00" at 49.3,2.6 h2.5
  text "CONNECTOR" at 11,0.6 h3
Mechanical 13:
  lines w0.254: -13.208,1.82 -12.7,0.296 ; -13.208,78.772 -12.7,80.296 ; -12.954,0.296 -12.446,0.296 ; -12.954,80.296 -12.446,80.296 ; -12.7,35.192 -12.7,0.296 ; -12.7,45.4 -12.7,80.296 ; -12.192,1.82 -12.7,0.296 ; -12.192,78.772 -12.7,80.296 ; -6.622,6.274 -6.114,4.75 ; -6.622,73.226 -6.114,74.75 ; -6.368,4.75 -5.86,4.75 ; -6.368,74.75 -5.86,74.75 ; -6.114,34.646 -6.114,4.75 ; -6.114,44.854 -6.114,74.75 ; -5.606,6.274 -6.114,4.75 ; -5.606,73.226 -6.114,74.75 ; -3.116,69.3 -2.608,67.776 ; -3.116,78.252 -2.608,79.776 ; -2.862,67.776 -2.354,67.776 ; -2.862,79.776 -2.354,79.776 ; -2.608,68.799 -2.608,67.776 ; -2.608,78.753 -2.608,79.776 ; -2.1,69.3 -2.608,67.776 ; -2.1,78.252 -2.608,79.776 ; -0.328,92.146 -0.328,92.654 ; 0.15,-5.34 0.15,-4.832 ; 1.196,91.892 -0.328,92.4 ; 1.196,92.908 -0.328,92.4 ; 1.674,-5.594 0.15,-5.086 ; 1.674,-4.578 0.15,-5.086 ; 4.924,82.638 4.924,83.146 ; 5.024,87.254 5.024,87.762 ; 6.448,82.384 4.924,82.892 ; 6.448,83.4 4.924,82.892 ; 6.548,87 5.024,87.508 ; 6.548,88.016 5.024,87.508 ; 22.32,82.892 4.924,82.892 ; 32.528,82.892 49.924,82.892 ; 32.546,-5.086 0.15,-5.086 ; 42.754,-5.086 75.15,-5.086 ; 48.4,82.384 49.924,82.892 ; 48.4,83.4 49.924,82.892 ; 49.924,82.638 49.924,83.146 ; 49.996,82.646 49.996,83.154 ; 51.52,82.392 49.996,82.9 ; 51.52,83.408 49.996,82.9 ; 68.933,92.4 -0.328,92.4 ; 69.285,87.508 5.024,87.508 ; 69.892,82.9 49.996,82.9 ; 73.626,-5.594 75.15,-5.086 ; 73.626,-4.578 75.15,-5.086 ; 75.15,-5.34 75.15,-4.832 ; 80.1,82.9 99.996,82.9 ; 80.41,92.4 149.672,92.4 ; 80.763,87.508 145.024,87.508 ; 98.472,82.392 99.996,82.9 ; 98.472,83.408 99.996,82.9 ; 99.996,82.646 99.996,83.154 ; 100.05,82.66 100.05,83.168 ; 101.574,82.406 100.05,82.914 ; 101.574,83.422 100.05,82.914 ; 117.446,82.914 100.05,82.914 ; 127.654,82.914 145.05,82.914 ; 143.5,87 145.024,87.508 ; 143.5,88.016 145.024,87.508 ; 143.526,82.406 145.05,82.914 ; 143.526,83.422 145.05,82.914 ; 145.024,87.254 145.024,87.762 ; 145.05,82.66 145.05,83.168 ; 148.148,91.892 149.672,92.4 ; 148.148,92.908 149.672,92.4 ; 149.672,92.146 149.672,92.654 ; 0,0 0,80 150,80 150,0 0,0
  text "150 (mm)" at 69.187,91.486 h1.52
  text "140 (mm)" at 69.539,86.594 h1.52
  text "50 (mm)" at 70.146,81.986 h1.52
  text "45 (mm)" at 117.7,82 h1.52
  text "45 (mm)" at 22.574,81.978 h1.52
  text "12 (mm)" at -1.694,69.053 h1.52 r90
  text "80 (mm)" at -11.786,35.446 h1.52 r90
  text "70 (mm)" at -5.2,34.9 h1.52 r90
  text "75 (mm)" at 32.8,-6 h1.52

## Text inside footprints (layer, text, board x,y; h text height)
C2: Top Overlay "+" at 117.4,74.25 h1.52 r270
C3: Top Overlay "+" at 61.35,59.1 h1.52 r180
C4: Top Overlay "+" at 64.8,68.3 h1.52 r180
C9: Top Overlay "+" at 128.95,40.5 h1.52 r270
C11: Top Overlay "+" at 128.95,29.5 h1.52 r270
C13: Top Overlay "+" at 128.95,18.5 h1.52 r270
C15: Top Overlay "+" at 128.95,51.5 h1.52 r270
C17: Top Overlay "+" at 128.95,62.5 h1.52 r270
CN-A: Top Overlay "1" at 48.23,73.222 h1.27; Top Overlay "2" at 48.23,75.762 h1.27; Top Overlay "40" at 101.062,75.762 h1.27; Top Overlay "39" at 101.062,73.222 h1.27
CN-B: Top Overlay "1" at 146.778,13.33 h1.27 r90; Top Overlay "2" at 144.238,13.33 h1.27 r90; Top Overlay "40" at 144.238,66.162 h1.27 r90; Top Overlay "39" at 146.778,66.162 h1.27 r90
CN-C: Top Overlay "1" at 6.778,13.33 h1.27 r90; Top Overlay "2" at 4.238,13.33 h1.27 r90; Top Overlay "40" at 4.238,66.162 h1.27 r90; Top Overlay "39" at 6.778,66.162 h1.27 r90
J2: Top Overlay "2" at 137.1,8.1 h1.27; Top Overlay "1" at 137.45,2.975 h1.27
J3: Top Overlay "2" at 104.3,7.9 h1.27; Top Overlay "1" at 104.45,2.975 h1.27
J4: Top Overlay "2" at 121.2,7.8 h1.27; Top Overlay "1" at 121.45,2.975 h1.27
J5: Top Overlay "2" at 104.35,52.575 h1.27; Top Overlay "1" at 104.55,59.025 h1.27
J6: Top Overlay "2" at 104.35,34.575 h1.27; Top Overlay "1" at 104.55,41.025 h1.27
J7: Top Overlay "2" at 104.35,21.575 h1.27; Top Overlay "1" at 104.55,28.025 h1.27
J8: Top Overlay "2" at 29.85,70.575 h1.27; Top Overlay "1" at 30.05,77.025 h1.27
J9: Top Overlay "1" at 41.4,10.3 h1.27
J10: Top Overlay "1" at 41.2,37.4 h1.27
J11: Top Overlay "1" at 41.1,24.6 h1.27
J12: Top Overlay "2" at 51.6,61.848 h1.27; Top Overlay "1" at 51.9,53.7 h1.27
J13: Top Overlay "2" at 29.7,60.5 h1.27; Top Overlay "1" at 29.9,54.7 h1.27
J14: Top Overlay "1" at 13.4,74.5 h1.27